# Altium PCB adderpcb.PcbDoc
Units mil, origin at the board's own origin, x right, y up, seen from the top; angles counter-clockwise.
Board outline 6000 x 4000 mil, 2 copper layers (Top Layer, Bottom Layer); 31 components, 53 nets, 154 pads, 44 vias.
Unrouted connection lines stored in the file: 90.
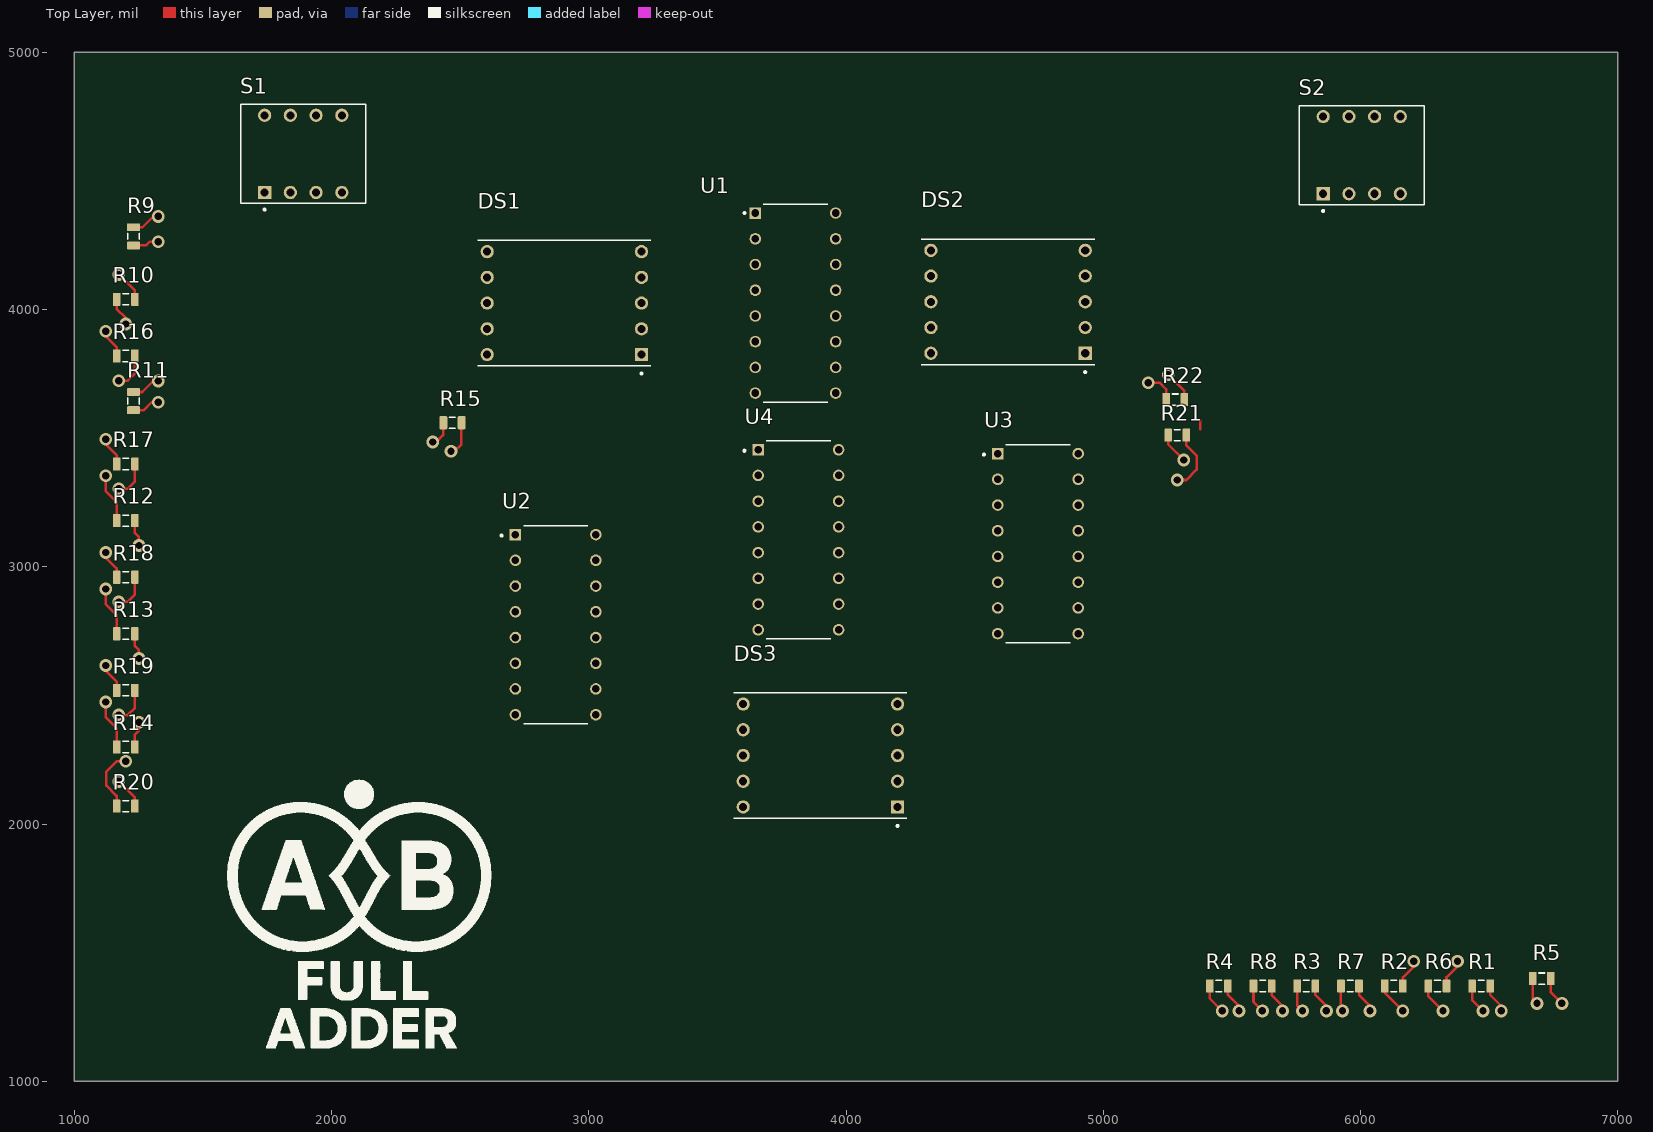
[diagram p0: Top Layer view]
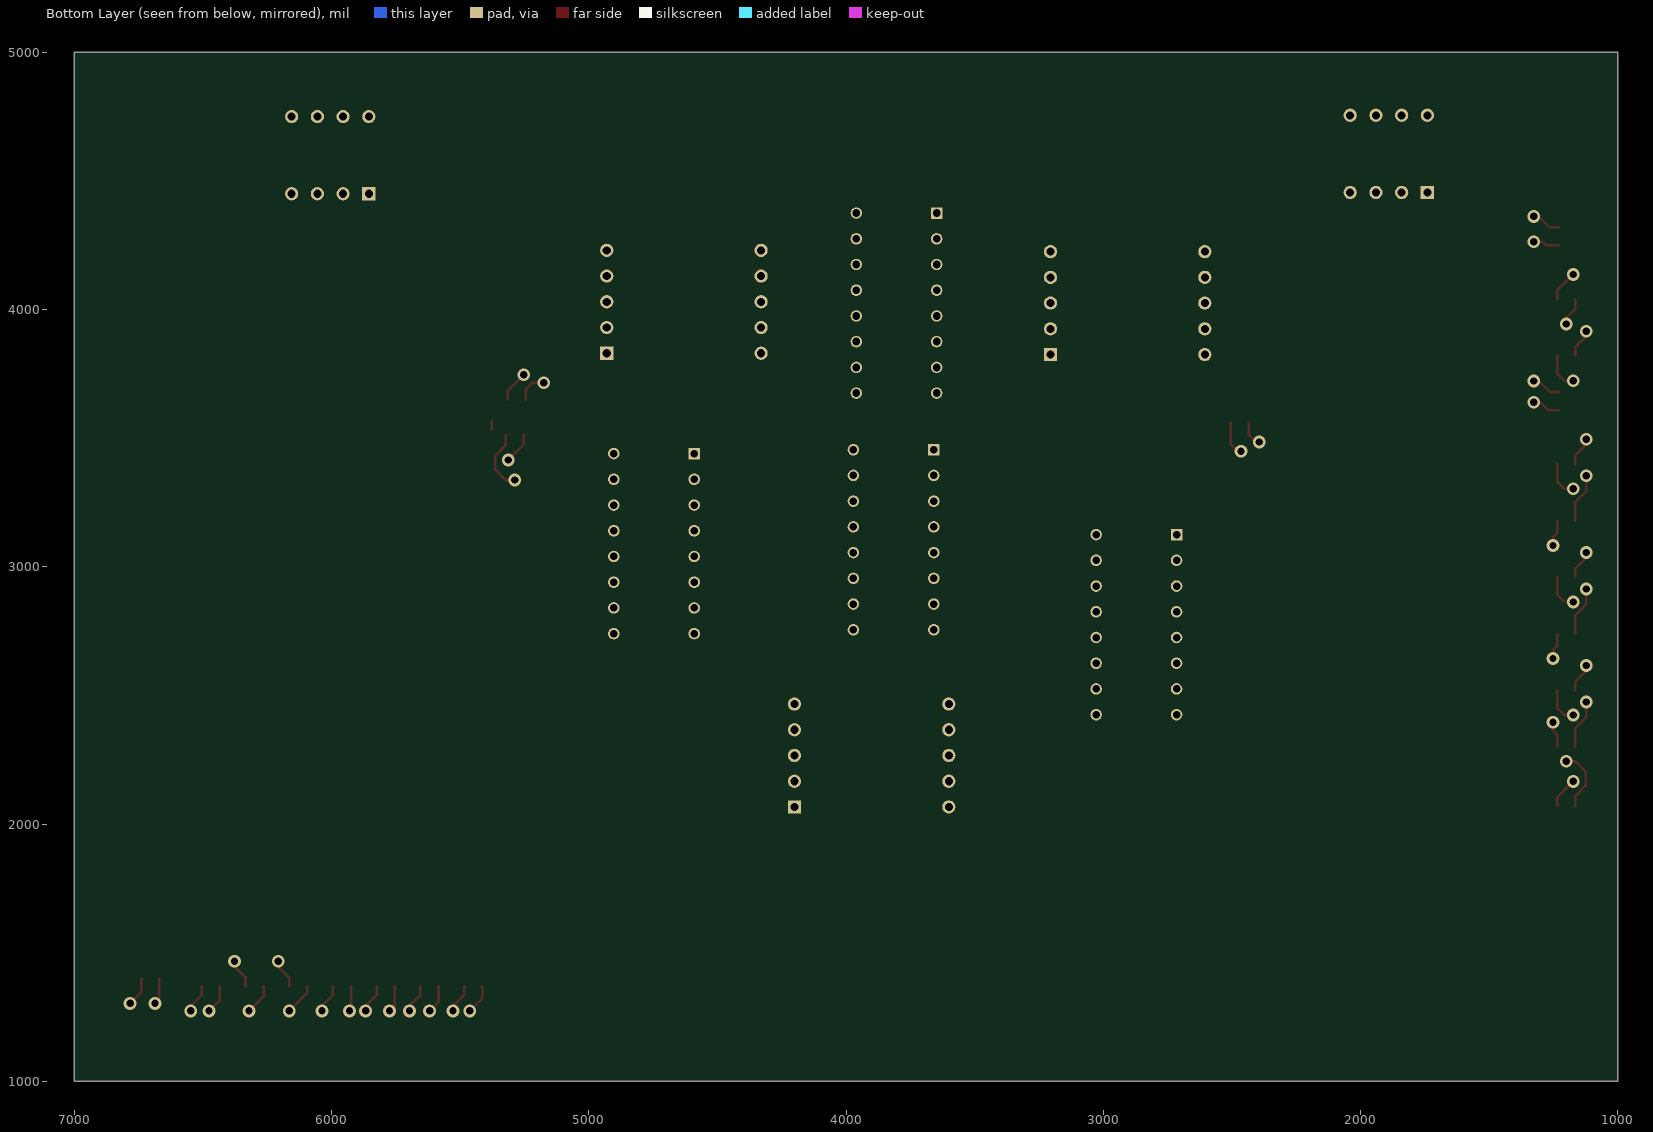
[diagram p1: Bottom Layer view, seen from below]

## Layer stack, top to bottom
Top Solder: solder mask 0.4, Solder Resist, Dk 3.5
Top Layer: signal copper 1.4
Dielectric 1: dielectric 12.6, FR-4, Dk 4.8
Bottom Layer: signal copper 1.4
Bottom Solder: solder mask 0.4, Solder Resist, Dk 3.5

## Board outline
1000,1000 7000,1000 7000,5000 1000,5000

## Design rules (kind name [scope] priority, off if disabled: settings)
Clearance [All] p1: gap=10 ignorepadtopadclearanceinfootprint=FALSE
PolygonConnect [All] p1: connectstyle=Relief reliefconductorwidth=10 reliefentries=4 polygonreliefangle="90 Angle" airgapwidth=10
RoutingVias [All] p1: holewidth=28 width=50 viastyle="Through Hole" minholewidth=28 minwidth=50 maxholewidth=28 maxwidth=50
SolderMaskExpansion [All] p1: expansion=4 istentingtop=FALSE
SupplyNets "Schematic Supply Nets" [InNet('GND')] p1: voltage=0.000
Width [All] p1: maxlimit=10 minlimit=10 preferedwidth=10
30 further rules are at their usual default settings.

## Components (designator, comment, footprint, x,y, rotation, side; value= is the part's Value field where it differs from the comment)
DS1 "HDSP-511Y" LED_HDSP-511Y 2905,4025 r90 top
DS2 "HDSP-511Y" LED_HDSP-511Y 4630,4030 r90 top
DS3 "HDSP-511Y" LED_HDSP-511Y 3900.28,2266.33 r90 top
R1 "Resistor 1K +/-5% 0805 125 mW" RESC0805(2012)_L 6469.5,1370 r0 top value=1k
R2 "Resistor 1K +/-5% 0805 125 mW" RESC0805(2012)_L 6129.5,1370 r0 top value=1k
R3 "Resistor 1K +/-5% 0805 125 mW" RESC0805(2012)_L 5789.5,1370 r0 top value=1k
R4 "Resistor 1K +/-5% 0805 125 mW" RESC0805(2012)_L 5449.5,1370 r0 top value=1k
R5 "Resistor 1K +/-5% 0805 125 mW" RESC0805(2012)_L 6704.96,1399.14 r0 top value=1k
R6 "Resistor 1K +/-5% 0805 125 mW" RESC0805(2012)_L 6299.5,1370 r0 top value=1k
R7 "Resistor 1K +/-5% 0805 125 mW" RESC0805(2012)_L 5959.5,1370 r0 top value=1k
R8 "Resistor 1K +/-5% 0805 125 mW" RESC0805(2012)_L 5619.5,1370 r0 top value=1k
R9 "Resistor 470R +/-5% 0805 125 mW" RESC0805(2012)_L 1230,4284.5 r90 top value=470
R10 "Resistor 470R +/-5% 0805 125 mW" RESC0805(2012)_L 1200,4039.5 r180 top value=470
R11 "Resistor 470R +/-5% 0805 125 mW" RESC0805(2012)_L 1230,3644.5 r90 top value=470
R12 "Resistor 470R +/-5% 0805 125 mW" RESC0805(2012)_L 1200,3179.5 r180 top value=470
R13 "Resistor 470R +/-5% 0805 125 mW" RESC0805(2012)_L 1200,2739.5 r180 top value=470
R14 "Resistor 470R +/-5% 0805 125 mW" RESC0805(2012)_L 1200,2299.5 r180 top value=470
R15 "Resistor 470R +/-5% 0805 125 mW" RESC0805(2012)_L 2470,3560 r180 top value=470
R16 "Resistor 470R +/-5% 0805 125 mW" RESC0805(2012)_L 1200,3819.5 r180 top value=470
R17 "Resistor 470R +/-5% 0805 125 mW" RESC0805(2012)_L 1200,3399.5 r180 top value=470
R18 "Resistor 470R +/-5% 0805 125 mW" RESC0805(2012)_L 1200,2959.5 r180 top value=470
R19 "Resistor 470R +/-5% 0805 125 mW" RESC0805(2012)_L 1200,2519.5 r180 top value=470
R20 "Resistor 470R +/-5% 0805 125 mW" RESC0805(2012)_L 1200,2069.5 r180 top value=470
R21 "Resistor 470R +/-5% 0805 125 mW" RESC0805(2012)_L 5288.19,3511.65 r0 top value=470
R22 "Resistor 470R +/-5% 0805 125 mW" RESC0805(2012)_L 5280,3650 r180 top value=470
S1 "206-4" SW_206-4 1890,4605 r90 top
S2 "206-4" SW_206-4 6005,4600 r90 top
U1 "SN74LS283N" DIP794W45P254L1969H508Q16 3803.7,4025 r0 top
U2 "SN74LS47N" DIP794W45P254L1930H508Q16 2871.3,2775 r0 top
U3 "SN74LS47N" DIP794W45P254L1930H508Q16 4746.3,3090 r0 top
U4 "SN74LS47N" DIP794W45P254L1930H508Q16 3815,3105 r0 top

## Footprints (in the part's own frame and the unit in brackets; to place one, negate y for a bottom-side part, rotate by r counter-clockwise, add the part's x,y. Pads: shape width x height; smd on the part's side, far side on the other; paste and mask are expansions set on the pad)
DIP794W45P254L1930H508Q16 [mm]
  rect 1.14x1.14 / inner round 1.14 / far side rect 1.14x1.14 hole 0.74: 1(-3.97,8.89)
  round 1.14 hole 0.74: 2(-3.97,6.35) 3(-3.97,3.81) 4(-3.97,1.27) 5(-3.97,-1.27) 6(-3.97,-3.81) 7(-3.97,-6.35) 8(-3.97,-8.89) 9(3.97,-8.89) 10(3.97,-6.35) 11(3.97,-3.81) 12(3.97,-1.27) 13(3.97,1.27) 14(3.97,3.81) 15(3.97,6.35) 16(3.97,8.89)
  silkscreen extent -5.43,-9.78 3.17,9.78, body extent -3.95,-10.67 3.95,10.67, height 5.08
DIP794W45P254L1969H508Q16 [mm]
  rect 1.13x1.13 hole 0.78: 1(-3.97,8.89)
  round 1.13 hole 0.78: 2(-3.97,6.35) 3(-3.97,3.81) 4(-3.97,1.27) 5(-3.97,-1.27) 6(-3.97,-3.81) 7(-3.97,-6.35) 8(-3.97,-8.89) 9(3.97,-8.89) 10(3.97,-6.35) 11(3.97,-3.81) 12(3.97,-1.27) 13(3.97,1.27) 14(3.97,3.81) 15(3.97,6.35) 16(3.97,8.89)
  silkscreen extent -5.13,-9.77 3.17,9.77, body extent -9.65,-5.46 9.65,5.46, height 5.08
LED_HDSP-511Y [mm]
  rect 1.308x1.308 / inner round 1.308 / far side rect 1.308x1.308 hole 0.8: 1(-5.08,-7.62)
  round 1.308 hole 0.8: 2(-2.54,-7.62) 3(0,-7.62) 4(2.54,-7.62) 5(5.08,-7.62) 6(5.08,7.62) 7(2.54,7.62) 8(0,7.62) 9(-2.54,7.62) 10(-5.08,7.62)
  silkscreen extent -7.05,-8.55 6.2,8.55, body extent -8.55,-6.2 8.55,6.2, height 8
RESC0805(2012)_L [mm] "Chip Resistor, Body 2.0x1.3mm, IPC High Density"
  rrect25% 0.76x1.3 smd: 1(-0.9,0) 2(0.89,0)
  silkscreen extent -0.3,-0.55 0.3,0.55, body extent -1,-0.62 1,0.63, height 0.6
SW_206-4 [mm]
  rect 1.308x1.308 / inner round 1.308 / far side rect 1.308x1.308 hole 0.8: 1(-3.81,3.81)
  round 1.308 hole 0.8: 2(-3.81,1.27) 3(-3.81,-1.27) 4(-3.81,-3.81) 5(3.81,-3.81) 6(3.81,-1.27) 7(3.81,1.27) 8(3.81,3.81)
  silkscreen extent -5.6,-6.17 4.89,6.17

## Part data
DS1 DS2 DS3: "Display Modules - LED Character and Numeric Yellow 7-Segment 1 Character Common Anode 2.15V 20mA 0.673 H x 0.488 W x 0.315 D (17.10mm x 12.40mm x 8.00mm) 10-DIP (0.600, 15.24mm)", Package=None, Check_prices=https://www.snapeda.com/parts/HDSP-511Y/Broadcom/view-part/?ref=eda, MF="Broadcom Limited", MP=HDSP-511Y, SnapEDA_Link=https://www.snapeda.com/parts/HDSP-511Y/Broadcom/view-part/?ref=snap
R1 R2 R3 R4 R5 R6 R7 R8: library part CMP-009-00118-3, "Chip Resistor, 1 kOhms, +/-5%, 125 mW, -55 to 155 degC, 0805", Case/Package=0805, Max Operating Temperature=155°C, Min Operating Temperature=-55°C, Power=125mW, Tolerance=5%, Pins=2
R9 R10 R11 R12 R13 R14 R15 R16 R17 R18 R19 R20 R21 R22: library part CMP-009-00122-3, "Chip Resistor, 470 Ohms, +/-5%, 125 mW, -55 to 155 degC, 0805", Case/Package=0805, Max Operating Temperature=155°C, Min Operating Temperature=-55°C, Power=125mW, Tolerance=5%, Pins=2
S1 S2: Package=None, Availability=Unavailable, MF="{'manufacturer': u'CTS Components'}", MP=206-4, Price=None
U1: "4-Bit Binary Full Adders With Fast Carry 16-PDIP 0 to 70", Package="PDIP-16 Texas Instruments", Availability=Good, Check_prices=https://www.snapeda.com/parts/SN74LS283N/Texas%20Instruments/view-part/454899/?ref=eda, MF="Texas Instruments", MP=SN74LS283N, Price=None, Purchase-URL=https://pricing.snapeda.com/search/part/SN74LS283N/?ref=eda, SnapEDA_Link=https://www.snapeda.com/parts/SN74LS283N/Texas%20Instruments/view-part/454899/?ref=snap
U2 U3 U4: "BCD-to-Seven-Segment Decoders/Drivers", Package="PDIP-16 Texas Instruments", Check_prices=https://www.snapeda.com/parts/SN74LS47N/Texas+Instruments/view-part/?ref=eda, MF="Texas Instruments", MP=SN74LS47N, SnapEDA_Link=https://www.snapeda.com/parts/SN74LS47N/Texas+Instruments/view-part/?ref=snap

## Via types
v1: diameter 50, hole 28, Top Layer to Bottom Layer, 44 vias

## Nets (pads, with @x,y where several pads share a name; then routed paths per layer and width w, separated by ;. In a path a pad name is that pad's centre, name@x,y a point inside that pad or via, vN(x,y) a via of type N, cw(c..) or ccw(c..) an arc to the next point about the centre after c; other vN are vias at no path point)
GND: R1.2 R2.2 R3.2 R4.2 R5.2 R6.2 R7.2 R8.2 U1.8 U2.8 U3.8 U4.8 | length 912.1
  Top Layer w10: R4.2 5484.54,1335.86 5527.3,1293.1 v1(5527.3,1273.7) ; R8.2 5654.54,1335.86 5697.3,1293.1 v1(5697.3,1273.7) ; R3.2 5824.54,1335.86 5867.3,1293.1 v1(5867.3,1273.7) ; R7.2 5994.54,1335.86 6037.3,1293.1 v1(6037.3,1273.7) ; R2.2 6164.54,1404.14 6207.3,1446.9 v1(6207.3,1466.3) ; R6.2 6334.54,1404.14 6377.3,1446.9 v1(6377.3,1466.3) ; R1.2 6504.54,1335.86 6547.3,1293.1 v1(6547.3,1273.7) ; R5.2 6740,1345.6 v1(6782.76,1302.83)
NetDS1_1: DS1.1 R13.2 | length 192
  Top Layer w10: v1(1122.2,2913.8) 1122.2,2855.4 1164.96,2812.64 R13.2
NetDS1_2: DS1.2 R12.2 | length 192
  Top Layer w10: v1(1122.2,3353.8) 1122.2,3295.4 1164.96,3252.64 R12.2
NetDS1_3: DS1.3 DS1.8 DS2.3 DS2.8 DS3.3 DS3.8
NetDS1_4: DS1.4 R11.2 | length 114
  Top Layer w10: R11.2 1264.14,3679.54 1306.9,3722.3 v1(1326.3,3722.3)
NetDS1_6: DS1.6 R10.2 | length 110.9
  Top Layer w10: R10.2 1164.96,4001.6 1200.2,3966.36 v1(1200.2,3943.2)
NetDS1_7: DS1.7 R9.2 | length 114
  Top Layer w10: R9.2 1264.14,4319.54 1306.9,4362.3 v1(1326.3,4362.3)
NetDS1_9: DS1.9 R14.2 | length 192
  Top Layer w10: v1(1122.2,2473.8) 1122.2,2415.4 1164.96,2372.64 R14.2
NetDS1_10: DS1.10 R15.2
NetDS2_1: DS2.1 R20.2 | length 242.7
  Top Layer w10: R20.2 1164.96,2109.23 1124.96,2149.23 1124.96,2203.8 1164.96,2243.8 v1(1200.2,2243.8)
NetDS2_2: DS2.2 R19.2 | length 114
  Top Layer w10: v1(1122.2,2615.8) 1122.2,2596.4 1164.96,2553.64 R19.2
NetDS2_4: DS2.4 R18.2 | length 114
  Top Layer w10: v1(1122.2,3055.8) 1122.2,3036.4 1164.96,2993.64 R18.2
NetDS2_6: DS2.6 R17.2 | length 114
  Top Layer w10: v1(1122.2,3495.8) 1122.2,3476.4 1164.96,3433.64 R17.2
NetDS2_7: DS2.7 R16.2 | length 114
  Top Layer w10: v1(1122.2,3915.8) 1122.2,3896.4 1164.96,3853.64 R16.2
NetDS2_9: DS2.9 R21.2 | length 242.7
  Top Layer w10: v1(5287.99,3337.35) 5323.23,3337.35 5363.23,3377.35 5363.23,3431.92 5323.23,3471.92 R21.2
NetDS2_10: DS2.10 R22.2 | length 120.4
  Top Layer w10: v1(5175,3715.5) 5219.19,3715.5 5244.96,3689.73 R22.2
NetDS3_1: DS3.1 U4.9
NetDS3_2: DS3.2 U4.10
NetDS3_4: DS3.4 U4.11
NetDS3_5: DS3.5 U1.9
NetDS3_6: DS3.6 U4.12
NetDS3_7: DS3.7 U4.13
NetDS3_9: DS3.9 U4.15
NetDS3_10: DS3.10 U4.14
NetR1_1: R1.1 S1.8 U1.5 U2.7 | length 113.9
  Top Layer w10: R1.1 6434.07,1316.13 v1(6476.5,1273.7)
NetR2_1: R2.1 S1.7 U1.3 U2.1 | length 125.5
  Top Layer w10: R2.1 6094.07,1344.13 v1(6164.5,1273.7)
NetR3_1: R3.1 S1.6 U1.14 U2.2 | length 104.8
  Top Layer w10: R3.1 5754.07,1294.13 v1(5774.5,1273.7)
NetR4_1: R4.1 S1.5 U1.12 U2.6 | length 116.4
  Top Layer w10: R4.1 5414.07,1322.13 v1(5462.5,1273.7)
NetR5_1: R5.1 S2.8 U1.6 U3.7 | length 103.1
  Top Layer w10: R5.1 6669.53,1319.26 v1(6685.96,1302.83)
NetR6_1: R6.1 S2.7 U1.2 U3.1 | length 119.7
  Top Layer w10: R6.1 6264.07,1330.13 v1(6320.5,1273.7)
NetR7_1: R7.1 S2.6 U1.15 U3.2 | length 99
  Top Layer w10: R7.1 5924.07,1280.13 v1(5930.5,1273.7)
NetR8_1: R8.1 S2.5 U1.11 U3.6 | length 110.6
  Top Layer w10: R8.1 5584.07,1308.13 v1(5618.5,1273.7)
NetR9_1: R9.1 U2.13 | length 102.3
  Top Layer w10: R9.1 1278.3,4249.07 1292.74,4263.5 v1(1326.3,4263.5)
NetR10_1: R10.1 U2.12 | length 122.2
  Top Layer w10: v1(1173,4135.8) 1235.43,4073.37 R10.1
NetR11_1: R11.1 U2.11 | length 108.9
  Top Layer w10: R11.1 1270.3,3609.07 1300.74,3639.5 v1(1326.3,3639.5)
NetR12_1: R12.1 U2.10 | length 102.8
  Top Layer w10: R12.1 1235.43,3131.76 1251,3116.2 v1(1251,3083.2)
NetR13_1: R13.1 U2.9 | length 102.8
  Top Layer w10: R13.1 1235.43,2691.76 1251,2676.2 v1(1251,2643.2)
NetR14_1: R14.1 U2.15 | length 102.8
  Top Layer w10: R14.1 1235.43,2347.24 1251,2362.8 v1(1251,2395.8)
NetR15_1: R15.1 U2.14 | length 158.5
  Top Layer w10: v1@2476.37,3447.41 2504.65,3475.7 R15.1@2504.65,3560 ; 5376.88,3534.51 5376.88,3568.65
  other v1: 2464.22,3449.22
NetR16_1: R16.1 U3.13 | length 142.2
  Top Layer w10: v1(1173,3723.2) 1207.15,3723.2 1235.43,3751.48 R16.1
NetR17_1: R17.1 U3.12 | length 142.2
  Top Layer w10: v1(1173,3303.2) 1207.15,3303.2 1235.43,3331.48 R17.1
NetR18_1: R18.1 U3.11 | length 142.2
  Top Layer w10: v1(1173,2863.2) 1207.15,2863.2 1235.43,2891.48 R18.1
NetR19_1: R19.1 U3.10 | length 142.2
  Top Layer w10: v1(1173,2423.2) 1207.15,2423.2 1235.43,2451.48 R19.1
NetR20_1: R20.1 U3.9 | length 122.2
  Top Layer w10: v1(1173,2165.8) 1235.43,2103.37 R20.1
NetR21_1: R21.1 U3.15 | length 121.3
  Top Layer w10: R21.1 5252.75,3475.78 v1(5313.19,3415.35)
NetR22_1: R22.1 U3.14 | length 122.2
  Top Layer w10: v1(5253,3746.3) 5315.43,3683.87 R22.1
NetS1_1: S1.1 S1.2 S1.3 S1.4 U2.16
NetS2_1: S2.1 S2.2 S2.3 S2.4 U3.16
NetU1_1: U1.1 U4.1
NetU1_4: U1.4 U4.7
NetU1_10: U1.10 U4.6
NetU1_13: U1.13 U4.2
NetU1_16: U1.16 U4.16
pads on no net: DS1.5 DS2.5 U1.7 U2.3 U2.4 U2.5 U3.3 U3.4 U3.5 U4.3 U4.4 U4.5
copper on no net: | length 88
  Top Layer w10: v1@2405.89,3483.76 2434.18,3512.04 2434.18,3560
  other v1: 2393.74,3485.56

## Silkscreen, mask and mechanical layers (free items; w line width, h text height)
Top Overlay:
  drawing of 13 lines, arcs and shapes, not listed